# Altium PCB STMkaN.PcbDoc
Units mm, origin at the board's own origin, x right, y up, seen from the top; angles counter-clockwise.
Board outline 43 x 17.6 mm, 2 copper layers (Top Layer, Bottom Layer), stack 1.27 mm thick; 29 components, 38 nets, 228 pads, 2 vias.
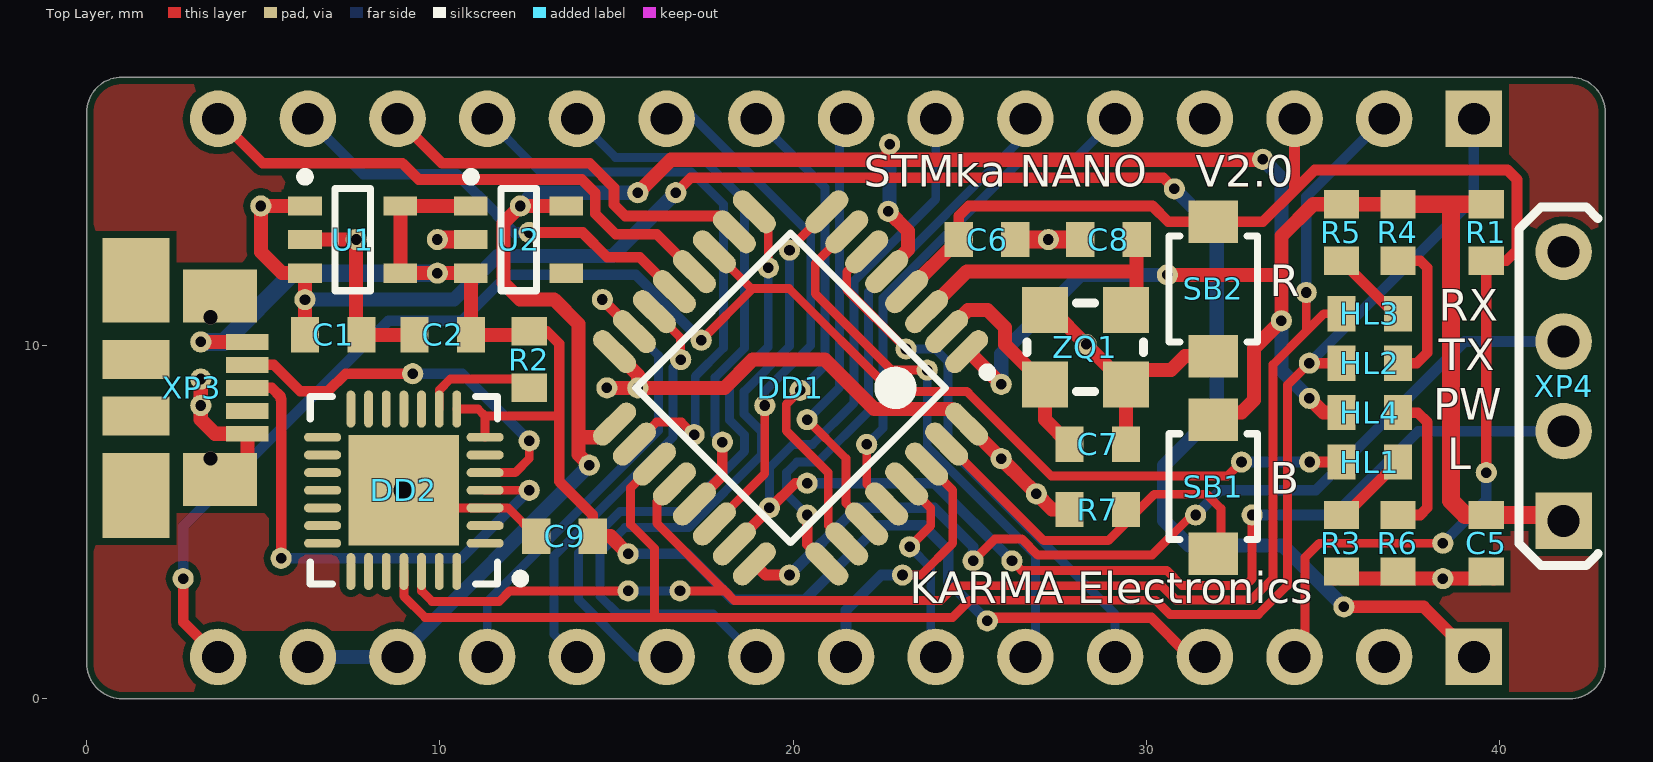
[diagram p0: Top Layer view]
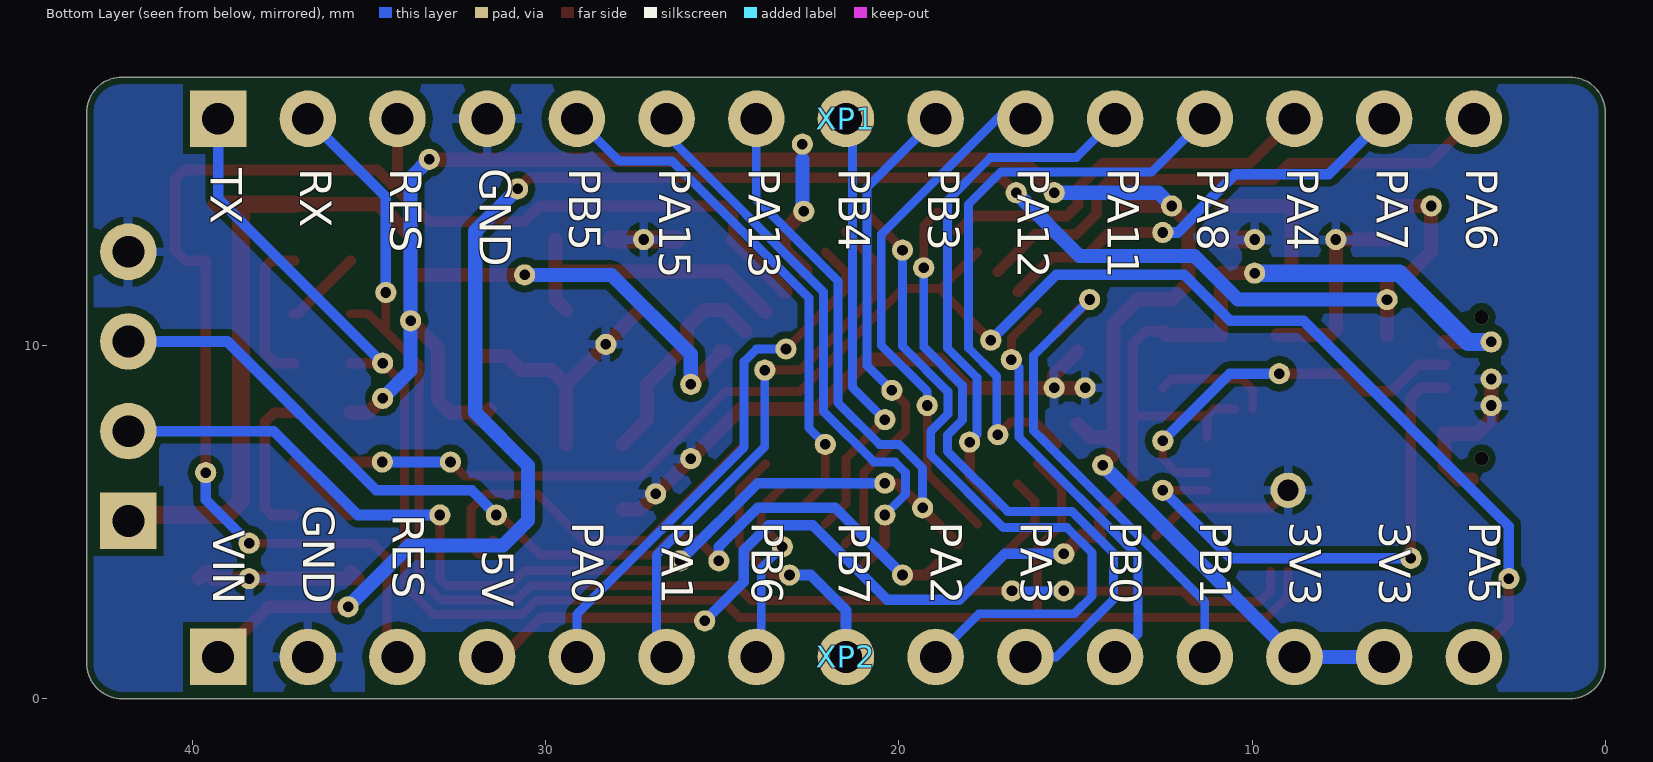
[diagram p1: Bottom Layer view, seen from below]

## Layer stack, top to bottom
Top Solder: solder mask 0.01, Solder Resist, Dk 3.5
Top Layer: signal copper 0.035
Dielectric 1: dielectric 1.2, FR-4, Dk 4.8
Bottom Layer: signal copper 0.035
Bottom Solder: solder mask 0.01, Solder Resist, Dk 3.5

## Board outline
0,1 0,16.6 cw(c1,16.6) 1,17.6 42,17.6 cw(c42,16.6) 43,16.6 43,1 cw(c42,1) 42,0 1,0 cw(c1,1)

## Design rules (kind name [scope] priority, off if disabled: settings)
Clearance [All] p1: gap=0.16 except(0.2: Arc-Poly Track-Poly SMDPad-Poly THPad-Poly Via-Poly Fill-Poly Poly-Poly)
PlaneClearance [All] p1: clearance=0.5
PlaneConnect [All] p1: planeconnectstyle=Relief reliefexpansion=0.508 reliefentries=4 reliefconductorwidth=0.25 reliefairgap=0.2
PolygonConnect [All] p1: connectstyle=Relief reliefconductorwidth=0.254 reliefentries=4 polygonreliefangle="90 Angle" airgapwidth=0.2
RoutingVias [All] p1: holewidth=0.3 width=0.6 viastyle="Through Hole" minholewidth=0.3 minwidth=0.6 maxholewidth=2 maxwidth=3
SolderMaskExpansion [All] p1: expansion=0.102
Width [All] p1: maxlimit=2 minlimit=0.2 preferedwidth=0.5
28 further rules are at their usual default settings.

## Components (designator, comment, footprint, x,y, rotation, side; value= is the part's Value field where it differs from the comment)
C1 "1u" 0603C 7.78,10.303 r180 top
C2 "1u" 0603C 9.28,10.3 r0 top
C5 "0.1u" 0603C 39.63,3.6 r90 top
C6 "1u" 0603C 24.696,13 r0 top
C7 "12p" 0603C 29.43,7.2 r180 top
C8 "12p" 0603C 28.13,13 r0 top
C9 "0.1u" 0603C 12.73,4.6 r0 top
DD1 "STM32F030K6T6" TQFP-32 19.93,8.8 r225 top
DD2 "CP2102" QFN-28 8.98,5.9 r180 top
HL1 "LED" 0603L 37.13,6.7 r180 top
HL2 "TX" 0603L 35.53,9.5 r0 top
HL3 "RX" 0603L 35.53,10.9 r0 top
HL4 "LED" 0603L 37.13,8.1 r180 top
R1 "10k" 0603R 39.63,14 r270 top
R2 "10k" 0603R 12.53,10.4 r270 top
R3 "1k" 0603R 35.53,3.6 r90 top
R4 "1k" 0603R 37.13,14 r270 top
R5 "1k" 0603R 35.53,14 r270 top
R6 "1k" 0603R 37.13,3.6 r90 top
R7 "10k" 0603R 29.43,5.354 r180 top
SB1 "B3U1000P" B3U1000P 31.9,6 r180 top
SB2 "B3U1000P" B3U1000P 31.9,11.6 r180 top
U1 "AP2204K-5.0TRG1" SOT23-5 7.53,13 r0 top
U2 "TC1185-3.3VCT713" SOT23-5 12.23,13 r0 top
XP1 "PLS-15" PLS-15 39.28,16.42 r180 bottom locked
XP2 "PLS-15" PLS-15 39.28,1.18 r180 bottom locked
XP3 "47346-0001" USB-micro 0,8.8 r0 top locked
XP4 "PLS-4" PLS-4 41.82,5.034 r90 top
ZQ1 "16MHz" SMD0302C4 27.23,9.1 r180 top

## Footprints (in the part's own frame and the unit in brackets; to place one, negate y for a bottom-side part, rotate by r counter-clockwise, add the part's x,y. Pads: shape width x height; smd on the part's side, far side on the other; paste and mask are expansions set on the pad)
0603C [mm]
  rect 0.8x1 smd: 1(0,0) 2(1.6,0)
  body extent -0.01,-0.38 1.64,0.42, height 0.81
0603L [mm]
  rect 0.8x1 smd: 1(0,0) 2(1.6,0)
  body extent -0.1,-0.5 1.7,0.5, height 0.5
0603R [mm]
  rect 0.8x1 smd: 1(0,0) 2(1.6,0)
  body extent -0.01,-0.38 1.64,0.42, height 0.31
B3U1000P [mm]
  rect 1.4x1.2 smd: 1(0,-1.9) 2(0,1.9)
  silkscreen extent -1.25,-1.5 1.25,1.5, body extent -1.25,-2 1.25,2, height 1.6
PLS-4 [mm]
  rect 1.6x1.6 hole 0.9: 1(0,0)
  round 1.6 hole 0.9: 2(2.54,0) 3(5.08,0) 4(7.62,0)
  silkscreen extent -1.27,-0.98 8.89,1.27, body extent -1.12,-1.12 8.74,1.12, height 8.5
PLS-15 [mm]
  rect 1.6x1.6 hole 0.9: 1(0,0)
  round 1.6 hole 0.9: 2(2.54,0) 3(5.08,0) 4(7.62,0) 5(10.16,0) 6(12.7,0) 7(15.24,0) 8(17.78,0) 9(20.32,0) 10(22.86,0) 11(25.4,0) 12(27.94,0) 13(30.48,0) 14(33.02,0) 15(35.56,0)
  body extent -1.12,-1.12 36.68,1.12, height 8.5
QFN-28 [mm] "QFN, 28-Leads, Body 5,00x5,00mm, Pitch 0,50mm, Thermal Pad 3,13x3,13mm, IPC Medium Density"
  oval 1.05x0.25 smd: 1(-2.3,1.5) 2(-2.3,1) 3(-2.3,0.5) 4(-2.3,0) 5(-2.3,-0.5) 6(-2.3,-1) 7(-2.3,-1.5) 15(2.3,-1.5) 16(2.3,-1) 17(2.3,-0.5) 18(2.3,0) 19(2.3,0.5) 20(2.3,1) 21(2.3,1.5)
  oval 0.25x1.05 smd: 8(-1.5,-2.3) 9(-1,-2.3) 10(-0.5,-2.3) 11(0,-2.3) 12(0.5,-2.3) 13(1,-2.3) 14(1.5,-2.3) 22(1.5,2.3) 23(1,2.3) 24(0.5,2.3) 25(0,2.3) 26(-0.5,2.3) 27(-1,2.3) 28(-1.5,2.3)
  rect 3.13x3.13 smd: 29(0,0)
  silkscreen extent -3.43,-2.65 2.65,2.65, body extent -2.5,-2.5 2.5,2.5, height 1
SMD0302C4 [mm] "SMD05032C4"
  rect 1.3x1.3 smd: 1(-2.2,-1.9) 2(0.1,-1.9) 3(0.1,0.2) 4(-2.2,0.2)
  silkscreen extent -2.7,-2.1 0.6,0.4, body extent -2.65,-2.1 0.55,0.4, height 0.8
SOT23-5 [mm] "SOT23, 5-Leads, Body 2,90x2,80mm, Pitch 0,95mm, IPC Medium Density"
  rect 0.95x0.55 smd: 1(-1.35,0.95) 2(-1.35,0) 3(-1.35,-0.95) 4(1.35,-0.95) 5(1.35,0.95)
  silkscreen extent -1.47,-1.45 0.5,1.9, body extent -0.87,-1.45 0.87,1.45, height 0.9
TQFP-32 [mm] "TQFP, 32-Leads, Body 7,00x7,00mm, Pitch 0,80mm, IPC Medium Density"
  oval 1.5x0.55 smd: 1(-4.25,2.8) 2(-4.25,2) 3(-4.25,1.2) 4(-4.25,0.4) 5(-4.25,-0.4) 6(-4.25,-1.2) 7(-4.25,-2) 8(-4.25,-2.8) 17(4.25,-2.8) 18(4.25,-2) 19(4.25,-1.2) 20(4.25,-0.4) 21(4.25,0.4) 22(4.25,1.2) 23(4.25,2) 24(4.25,2.8)
  oval 0.55x1.5 smd: 9(-2.8,-4.25) 10(-2,-4.25) 11(-1.2,-4.25) 12(-0.4,-4.25) 13(0.4,-4.25) 14(1.2,-4.25) 15(2,-4.25) 16(2.8,-4.25) 25(2.8,4.25) 26(2,4.25) 27(1.2,4.25) 28(0.4,4.25) 29(-0.4,4.25) 30(-1.2,4.25) 31(-2,4.25) 32(-2.8,4.25)
  silkscreen extent -4.37,-3.1 3.1,3.75, body extent -3.5,-3.5 3.5,3.5, height 1.2
USB-micro [mm]
  rect 1.9x2.4 smd: 0(1.4,-3.05) 0(1.4,3.05)
  rect 1.9x1.1 smd: 0(1.4,-0.8) 0(1.4,0.8)
  rect 2.1x1.5 smd: 0(3.775,-2.6) 0(3.775,2.6)
  rect 1.2x0.45 smd: 1(4.55,1.3) 2(4.55,0.65) 3(4.55,0) 4(4.55,-0.65) 5(4.55,-1.3)
  body extent -0.7,-3.99 4.73,3.99, height 2.68

## Part data
C1 C2 C5 C6 C7 C8 C9: library part SMD-CAP, "Capacitor"
DD1: "Controller"
HL1 HL4: library part LEDx1
HL2 HL3: library part LEDx1, "LED"
R1 R2 R3 R4 R5 R6 R7: library part SMD-RES, "Resistor"
SB1 SB2: library part SWITCH, "Button"
U1 U2: library part TPS76333DBVR, "POWER"
XP1 XP2: library part XP15, "Connector"
XP3: library part USB-micro, "Connector"
XP4: library part XP4, "Connector"
ZQ1: library part Quartz, "Quartz"

## Free pads (board coordinates)
  round 0.6 hole 0.3 mask+0: 1(2.73,3.4) 1(3.23,8.3) 1(3.23,9.05) 1(3.23,10.1) 1(4.93,13.95) 1(5.505,3.975) 1(6.18,11.3) 1(7.63,13) 1(9.23,9.2) 1(9.93,12.05) 1(9.93,13) 1(12.28,13.95) 1(12.53,5.9) 1(12.53,7.3) 1(12.53,13.2) 1(14.23,6.61) 1(14.601,11.301) 1(14.73,8.8) 1(15.33,3.05) 1(15.33,4.1) 1(15.605,8.8) 1(15.605,14.325) 1(16.68,14.325) 1(16.8,3.05) 1(16.82,9.6) 1(17.2,7.474) 1(17.4,10.149) 1(18,7.264) 1(19.2,8.3) 1(19.3,12.2) 1(19.33,5.4) 1(19.9,3.5) 1(19.9,12.7) 1(20.2,8.727) 1(20.4,5.2) 1(20.4,6.1) 1(20.4,7.9) 1(22.087,7.2) 1(22.696,13.8) 1(22.734,15.7) 1(23.1,3.5) 1(23.2,9.9) 1(23.3,4.3) 1(23.8,9.303) 1(25.1,3.9) 1(25.5,2.2) 1(25.895,6.795) 1(25.895,8.9) 1(26.2,3.9) 1(26.89,5.8) 1(27.23,13) 1(28.3,10.03) 1(30.6,12) 1(30.8,14.433) 1(31.4,5.2) 1(32.7,6.7) 1(33,5.2) 1(33.3,15.273) 1(33.83,10.7) 1(34.53,11.5) 1(34.622,8.5) 1(34.622,9.5) 1(34.63,6.7) 1(35.6,2.6) 1(38.4,3.4) 1(38.4,4.4) 1(39.63,6.4)
  round 1 hole 0.6: 2(8.98,5.9)

## Via types
v1: diameter 0.4, hole 0.4, Top Layer to Bottom Layer, tented both sides, 2 vias

## Nets (pads, with @x,y where several pads share a name; then routed paths per layer and width w, separated by ;. In a path a pad name is that pad's centre, name@x,y a point inside that pad or via, vN(x,y) a via of type N, cw(c..) or ccw(c..) an arc to the next point about the centre after c; other vN are vias at no path point)
3V3: C5.2 DD1.1 DD1.5 DD1.17 HL4.2 pad.1@12.28,13.95 pad.1@14.23,6.61 pad.1@15.605,14.325 pad.1@22.696,13.8 pad.1@22.734,15.7 pad.1@25.895,8.9 pad.1@30.6,12 pad.1@33.3,15.273 pad.1@33.83,10.7 pad.1@34.622,8.5 R1.1 R4.1 R5.1 SB1.1 U2.5 XP2.13 XP2.14 XP4.1 | length 91.6
  Top Layer w0.3: XP4.1@41.654,5.2 XP4.1
  Top Layer w0.4: U2.5 12.28,13.95 11.8,13.47 11.8,11.77 12.27,11.3 13.237,11.3 13.93,10.607 13.93,7.4 ; pad.1@14.23,6.61 13.93,6.91 13.93,7.4 ; DD1.17 14.57,7.4 13.93,7.4 ; pad.1@15.605,14.325 16.54,15.26 22.7,15.26 ; DD1.5 22.652,12.122 23.253,12.722 23.253,13.243 pad.1@22.696,13.8 ; pad.1@22.734,15.7 22.7,15.666 22.7,15.26 ; DD1.1 DD1.1@24.97,9.825 ; DD1.1@25.075,9.825 DD1.1@24.97,9.825 ; pad.1@25.895,8.9 DD1.1@24.97,9.825 ; pad.1@30.6,12 33.83,12 ; SB1.1@31.6,8.2 SB1.1 32.1,8.1 32.7,8.1 33.053,8.453 33.053,9.923 33.83,10.7 33.83,12 ; pad.1@33.3,15.26 22.7,15.26 ; pad.1@34.622,8.5 35.022,8.1 HL4.2 ; R4.1 34.73,14 33.83,13.1 33.83,12
  Top Layer w0.5: R4.1 38.63,14 ; R1.1@39.33,14 38.63,14 ; XP4.1@41.654,5.2 39.03,5.2 38.63,5.6 38.63,14
  Bottom Layer w0.4: XP2.14 XP2.13 pad.1@14.23,6.61 ; pad.1@12.28,13.95 12.655,14.325 pad.1@15.605,14.325 ; pad.1@22.73,13.76 22.73,15.26 ; pad.1@25.895,8.9 25.895,9.76 28.135,12 pad.1@30.6,12 ; pad.1@33.3,15.273 33.83,14.743 33.83,10.7 33.83,9.292 pad.1@34.622,8.5
5V: C2.2 C9.2 DD2.7 DD2.8 pad.1@3.23,10.1 pad.1@9.93,12.05 pad.1@15.33,4.1 pad.1@25.5,2.2 R2.1 U1.4 U1.5 U2.1 U2.3 XP2.4 XP3.1 | length 49.6
  Top Layer w0.25: DD2.8 11.08,8.2 11.28,8 ; DD2.7 11.28,8 ; 13.405,8 13.38,8 11.28,8
  Top Layer w0.3: R2.1 13.03,10.4 13.38,10.05 13.38,8 13.38,6.15 14.33,5.2 C9.2 ; pad.1@25.5,2.197 25.593,2.29 30.14,2.29 31.25,1.18 XP2.4
  Top Layer w0.4: pad.1@3.23,10.1 XP3.1 ; U1.4 U1.5 ; U1.4@8.93,12.05 9.93,12.05 U2.3 C2.2 12.43,10.3 R2.1 ; U1.5@8.98,13.95 U2.1 ; C9.2 14.83,4.6 pad.1@15.33,4.1
  Bottom Layer w0.3: pad.1@15.33,4.1 17,4.1 18.3,2.8 20.33,2.8 22.44,4.91 23.69,4.91 24.4,4.2 24.4,3.305 pad.1@25.5,2.205
  Bottom Layer w0.5: pad.1@3.23,10.1 3.888,10.1 5.838,12.05 pad.1@9.93,12.05
A0: DD1.15 pad.1@14.601,11.301 XP2.12 | length 14.1
  Top Layer w0.3: pad.1@14.601,11.301 DD1.15
  Bottom Layer w0.25: XP2.12 11.34,2.74 15.9,7.3 16.19,7.59 16.19,9.712 pad.1@14.601,11.301
A1: DD1.14 pad.1@16.82,9.6 XP2.11 | length 11.8
  Top Layer w0.25: DD1.14 16.815,10.218 16.815,9.907 16.82,9.902 pad.1@16.82,9.6
  Bottom Layer w0.25: XP2.11 13.23,1.83 13.23,4.03 16.6,7.4 16.6,9.38 pad.1@16.82,9.6
A2: DD1.9 pad.1@19.3,12.2 XP2.10 | length 18
  Top Layer w0.25: DD1.9 19.3,13.39 pad.1@19.3,12.2
  Bottom Layer w0.25: XP2.10 15.55,1.18 13.93,2.8 13.93,4.13 15.103,5.303 16.924,5.303 18.63,7.01 18.63,7.463 18.205,7.888 18.205,8.865 19.3,9.959 pad.1@19.3,12.2
A3: DD1.8 pad.1@19.9,12.7 XP2.9 | length 20.2
  Top Layer w0.25: pad.1@19.834,12.664 DD1.8
  Bottom Layer w0.25: XP2.9 17.735,2.405 15.032,2.405 14.53,2.906 14.53,4.13 15.243,4.843 17.043,4.843 19.1,6.9 19.1,7.573 18.615,8.058 18.615,8.695 19.9,9.98 pad.1@19.9,12.7
A4_SDA: DD1.30 pad.1@23.1,3.5 XP2.8 | length 8.4
  Top Layer w0.25: XP2.8 XP2.8@21.5,1.43 ; pad.1@23.1,3.5 23.625,3.5 24.525,4.4 24.525,5.902 DD1.30
  Bottom Layer w0.3: XP2.8@21.361,1.638 XP2.8 21.5,2.5 22.5,3.5 pad.1@23.1,3.5
A5_SCL: DD1.29 pad.1@23.3,4.3 XP2.7 | length 5.7
  Top Layer w0.25: DD1.29 23.9,5.396 23.9,4.9 pad.1@23.3,4.3
  Bottom Layer w0.25: pad.1@23.3,4.3 23.9,3.7 23.9,1.32 XP2.7
A6: DD1.7 pad.1@23.8,9.303 XP2.6 | length 15.7
  Top Layer w0.25: DD1.7 20.63,12.328 20.63,11.47 22.797,9.303 pad.1@23.8,9.303
  Bottom Layer w0.25: pad.1@23.8,9.303 23.8,7.127 26.87,4.058 26.87,1.47 XP2.6
A7: DD1.6 pad.1@23.2,9.9 XP2.5 | length 15.3
  Top Layer w0.25: DD1.6 21.521,12.088 21.521,11.579 pad.1@23.2,9.9
  Bottom Layer w0.25: pad.1@23.2,9.9 24.03,9.9 24.385,9.545 24.385,7.122 29.12,2.387 XP2.5
BOOT0: DD1.31 R7.1 SB1.2 | length 11.1
  Top Layer w0.25: DD1.31@24.512,7.062 27.1,4.475 28.921,4.475 30.231,5.785 31.715,5.785 32.115,5.385 32.115,4.315 SB1.2 ; SB1.2@31.5,4.5 SB1.2@31.74,4.26
CLK: DD1.24 pad.1@19.9,3.5 pad.1@25.1,3.9 pad.1@31.4,5.2 XP4.3 | length 27.6
  Top Layer w0.25: pad.1@25.1,3.9 25.723,4.523 26.472,4.523 26.93,4.065 30.162,4.065 31.297,5.2 pad.1@31.4,5.2
  Top Layer w0.3: DD1.24 19.22,3.5 pad.1@19.9,3.5
  Bottom Layer w0.3: pad.1@19.9,3.5 21.8,5.4 24,5.4 25.1,4.3 pad.1@25.1,3.9 ; pad.1@31.4,5.2 32.1,5.9 34.8,5.9 39.014,10.114 XP4.3
D2: DD1.28 pad.1@22.087,7.2 XP1.5 | length 14.9
  Top Layer w0.25: pad.1@22.087,7.2 22.087,6.078 DD1.28
  Bottom Layer w0.25: pad.1@22.087,7.2 22.55,7.663 22.55,11.35 26.419,15.219 27.92,15.219 XP1.5
D3: DD1.25 pad.1@20.4,5.2 XP1.6 | length 16.2
  Top Layer w0.3: pad.1@20.4,5.2 20.4,4.37 DD1.25
  Bottom Layer w0.25: pad.1@20.4,5.2 19.815,5.785 19.815,6.399 20.115,6.7 20.703,6.7 22.14,8.136 22.14,11.52 26.58,15.96 XP1.6
D4_DIO: DD1.23 pad.1@19.33,5.4 pad.1@20.4,6.1 pad.1@26.2,3.9 pad.1@33,5.2 XP1.7 XP4.2 | length 41.6
  Top Layer w0.25: pad.1@26.2,3.9 26.47,3.63 30.58,3.63 31.005,3.205 32.805,3.205 33,3.4 pad.1@33,5.2
  Top Layer w0.3: DD1.23 19.344,5.386 20.059,6.1 pad.1@20.4,6.1
  Bottom Layer w0.25: pad.1@19.33,5.4 19.33,6.53 20,7.2 20.55,7.2 21.73,8.379 21.73,11.83 24.04,14.14 XP1.7
  Bottom Layer w0.3: pad.1@20.4,6.1 24,6.1 pad.1@26.2,3.9 ; pad.1@32.93,5.2 33,5.2 35.33,5.2 37.704,7.574 XP4.2
D5: DD1.27 pad.1@20.4,7.9 XP1.8 | length 13
  Top Layer w0.25: pad.1@20.4,7.9 21.5,6.8 21.5,5.533 DD1.27@22.087,4.946
  Bottom Layer w0.25: pad.1@20.4,7.9 21.32,8.82 21.32,16.16 XP1.8@21.5,16.34 ; XP1.8@21.32,16.16 XP1.8@21.5,16.34 ; XP1.8 XP1.8@21.5,16.34 ; XP1.8@21.58,16.42 21.54,16.38 XP1.8@21.5,16.34
D6: DD1.26 pad.1@20.2,8.727 XP1.9 | length 14
  Top Layer w0.25: pad.1@20.2,8.727 19.81,8.337 19.81,7.59 21,6.4 21,4.902 DD1.26
  Bottom Layer w0.25: XP1.9 20.91,14.47 20.91,9.437 pad.1@20.2,8.727
D7: DD1.22 pad.1@19.2,8.3 XP1.10 | length 14.4
  Top Layer w0.25: DD1.22@17.774,4.946 19.2,6.373 pad.1@19.2,8.3
  Bottom Layer w0.25: XP1.10@16.82,16.52 17.122,16.52 20.5,13.142 20.5,10 19.2,8.7 pad.1@19.2,8.3
D8: DD1.21 pad.1@18,7.264 XP1.11 | length 15.6
  Top Layer w0.3: DD1.21 DD1.21@17.6,5.904 ; DD1.21 18,6.304 pad.1@18,7.264
  Bottom Layer w0.25: XP1.11 14.977,15.323 17.407,15.323 18.63,14.1 18.63,9.93 17.79,9.09 17.79,7.474 pad.1@18,7.264
D9: DD1.18 pad.1@17.2,7.474 XP1.12 | length 16.7
  Top Layer w0.25: DD1.18@15.511,7.238 DD1.18 16.136,7.834 16.84,7.834 pad.1@17.2,7.474
  Bottom Layer w0.25: XP1.12 12.847,14.913 17.117,14.913 18.03,14 18.03,9.93 17.23,9.13 pad.1@17.23,7.5
GND: C1.1 C2.1 C5.1 C6.2 C7.1 C8.1 C9.1 DD1.16 DD1.32 DD2.3 DD2.29 pad.1@3.23,8.3 pad.1@3.23,9.05 pad.1@7.63,13 pad.1@9.93,13 pad.1@14.73,8.8 pad.1@15.605,8.8 pad.1@25.895,6.795 pad.1@26.89,5.8 pad.1@27.23,13 pad.1@28.3,10.03 pad.1@38.4,3.4 pad.2 R3.1 R6.1 R7.2 SB2.2 U1.2 U2.2 XP1.4 XP2.2 XP3.0@3.775,6.2 XP3.5 XP4.4 ZQ1.2 ZQ1.4 | length 46.4
  Top Layer w0.25: DD2.29 9.48,5.4 11.93,5.4 C9.1
  Top Layer w0.4: pad.1@3.23,9.05 3.23,8.3 3.23,7.9 3.63,7.5 XP3.5 4.55,6.598 4.152,6.2 XP3.0@3.775,6.2 ; U1.2 7.63,13 7.63,10.453 C1.1 7.78,10.3 C2.1 ; pad.1@14.73,8.8 pad.1@15.605,8.8 ; DD1.16 15.605,9.165 pad.1@15.605,8.8 ; DD1.32 25.79,6.9 25.895,6.795 26.195,6.495 26.295,6.395 26.395,6.295 26.89,5.8 27.336,5.353 R7.2 ; DD1.32 24.49,8.2 22.3,8.2 20.9,9.6 18.86,9.6 18.06,8.8 pad.1@15.605,8.8 ; ZQ1.2 27.33,11 28.3,10.03 ZQ1.4 ; C7.1 ZQ1.4 ; SB2.2 31.1,9.7 30.703,9.303 29.833,9.303 ZQ1.4 ; R3.1@35.33,3.4 R3.1 ; R3.1@35.53,3.4 R6.1@37.13,3.4 ; XP2.2 XP2.2@36.93,1.37 ; R6.1@37.13,3.4 38.4,3.4 39.43,3.4 C5.1 C5.1@39.83,3.4
  Top Layer w0.5: pad.1@9.93,13 U2.2 ; C6.2 27.23,13 C8.1
NetC7_2: C7.2 DD1.2 ZQ1.3 | length 6.2
  Top Layer w0.4: DD1.2 24.958,11 25.507,11 26,10.507 26,10.03 ZQ1.3 27.13,7.9 C7.2
NetC8_2: C8.2 DD1.3 ZQ1.1 | length 8.5
  Top Layer w0.4: DD1.3 24.927,12.1 29.725,12.1 ; ZQ1.1 29.73,11.3 C8.2
NetDD2_4: DD2.4 pad.1@5.505,3.975 pad.1@12.53,5.9 XP3.3 | length 14.7
  Top Layer w0.25: DD2.4 pad.1@12.53,5.9
  Top Layer w0.3: XP3.3 5.24,8.8 5.5,8.54 5.5,8.48 5.505,8.475 pad.1@5.505,3.975
  Bottom Layer w0.3: pad.1@5.505,3.975 10.605,3.975 pad.1@12.53,5.9
NetDD2_5: DD2.5 pad.1@9.23,9.2 pad.1@12.53,7.3 XP3.2 | length 11.2
  Top Layer w0.25: DD2.5 12.13,6.4 12.53,6.8 pad.1@12.53,7.3
  Top Layer w0.3: XP3.2 5.297,9.45 6.047,8.7 6.83,8.7 7.33,9.2 pad.1@9.23,9.2
  Bottom Layer w0.3: pad.1@9.23,9.2 10.63,9.2 pad.1@12.53,7.3
NetDD2_9: DD2.9 R2.2 | length 3.3
  Top Layer w0.25: DD2.9 9.98,8.736 10.294,9.05 12.28,9.05 R2.2
NetHL1_1: HL1.1 R3.2 | length 2.2
  Top Layer w0.3: R3.2 35.63,5.2 HL1.1
NetHL2_2: HL2.2 R4.2 | length 4.3
  Top Layer w0.3: HL2.2 37.664,9.5 37.96,9.796 37.96,12.2 37.76,12.4 R4.2
NetHL3_2: HL3.2 R5.2 | length 2.2
  Top Layer w0.3: R5.2 37.03,10.9 HL3.2
NetHL4_1: HL4.1 R6.2 | length 4.3
  Top Layer w0.3: R6.2 37.76,5.2 37.96,5.4 37.96,7.834 37.694,8.1 HL4.1
RESET: C6.1 DD1.4 pad.1@38.4,4.4 pad.1@39.63,6.4 R1.2 SB2.1 XP1.3 XP2.3 | length 40.2
  Top Layer w0.25: XP2.3 34.5,1.48 34.5,4 34.9,4.4 pad.1@38.4,4.4
  Top Layer w0.3: C6.1 24.696,13.666 24.98,13.95 30.18,13.95 30.63,13.5 SB2.1 33.3,13.5 34.2,14.4 ; XP1.3 34.2,14.4 ; pad.1@39.63,6.4 R1.2 40.2,12.4 40.5,12.7 40.5,14.7 40.23,14.97 34.77,14.97 34.2,14.4
  Top Layer w0.4: DD1.4@23.253,11.522 DD1.4 C6.1
  Bottom Layer w0.3: pad.1@38.4,4.4 39.63,5.63 pad.1@39.63,6.4
SPI_CS: DD1.10 XP1.13 | length 11.1
  Top Layer w0.3: XP1.13 10.06,15.16 14.24,15.16 14.93,14.47 14.93,13.985 15.25,13.666 17.893,13.666 DD1.10
SPI_MISO: DD1.12 XP1.15 | length 15.6
  Top Layer w0.3: XP1.15 4.98,15.16 8.94,15.16 9.4,14.7 14.019,14.7 14.4,14.319 14.4,13.73 14.98,13.15 16.146,13.15 DD1.12
SPI_MOSI: DD1.13 pad.1@12.53,13.2 XP1.14 | length 12.5
  Top Layer w0.3: pad.1@12.53,13.2 14.04,13.2 14.74,12.5 15.664,12.5 DD1.13 DD1.13@16.608,11.522
  Bottom Layer w0.3: XP1.14 7.832,14.847 10.482,14.847 11.63,13.7 11.63,13.681 12.111,13.2 pad.1@12.53,13.2
SPI_SCK: DD1.11 HL1.2 pad.1@2.73,3.4 pad.1@17.4,10.149 pad.1@32.7,6.7 pad.1@34.63,6.7 XP2.15 | length 45.1
  Top Layer w0.25: pad.1@17.4,10.149 18.865,11.615 19.885,11.615 22.8,8.7 24.919,8.7 25.077,8.542 27.319,6.3 32.3,6.3 pad.1@32.7,6.7 ; DD1.11 18.827,11.6
  Top Layer w0.3: pad.1@2.73,3.4 2.73,2.17 XP2.15 ; pad.1@34.63,6.7 HL1.2
  Bottom Layer w0.3: pad.1@2.73,3.4 2.73,4.885 8.545,10.7 10.621,10.7 11.921,12 15.549,12 pad.1@17.4,10.149 ; pad.1@32.7,6.7 pad.1@34.63,6.7
UART_RX: DD1.20 DD2.26 HL3.1 pad.1@15.33,3.05 pad.1@16.8,3.05 pad.1@34.53,11.5 XP1.2 | length 45.1
  Top Layer w0.25: DD2.26 9.48,3.05 9.78,2.75 11.68,2.75 11.98,3.05 pad.1@15.33,3.05 ; DD1.20 16.146,5.581 16.146,4.969 18.015,3.1 ; pad.1@16.8,3.05 18.065,3.05 18.335,2.78 24.18,2.78 24.595,3.195 30.435,3.195 30.835,2.795 32.975,2.795 33.59,3.41 33.59,9.46 34.53,10.4 ; pad.1@34.53,11.5 34.53,10.4 ; HL3.1 35.03,10.9 34.53,10.4
  Bottom Layer w0.25: pad.1@15.33,3.05 pad.1@16.8,3.05
  Bottom Layer w0.3: pad.1@34.53,11.5 34.53,14.21 XP1.2
UART_TX: DD1.19 DD2.25 HL2.1 pad.1@34.622,9.5 XP1.1 | length 47.9
  Top Layer w0.25: DD2.25 8.98,2.9 9.58,2.3 16.076,2.3 ; DD1.19 15.4,5.967 15.4,4.93 16.076,4.254 16.076,2.3 ; pad.1@34.622,9.5 34,8.878 34,3.205 33.18,2.385 30.666,2.385 30.266,2.785 25.005,2.785 24.52,2.3 16.076,2.3
  Top Layer w0.3: pad.1@34.622,9.5 HL2.1
  Bottom Layer w0.3: pad.1@34.622,9.5 39.28,14.158 XP1.1
VIN: C1.2 pad.1@4.93,13.95 pad.1@6.18,11.3 pad.1@16.68,14.325 pad.1@30.8,14.433 pad.1@35.6,2.6 U1.1 U1.3 XP2.1 | length 52.9
  Top Layer w0.3: pad.1@16.68,14.325 17.105,14.75 30.483,14.75 pad.1@30.8,14.433
  Top Layer w0.35: pad.1@35.6,2.6 37.86,2.6 XP2.1
  Top Layer w0.4: C1.2 6.18,11.3 U1.3 5.53,12.05 4.93,12.65 4.93,13.95 U1.1
  Bottom Layer w0.4: pad.1@6.18,11.3 10.4,11.3 11.629,12.529 14.884,12.529 pad.1@16.68,14.325 ; pad.1@30.8,14.433 32,13.233 32,8.1 30.5,6.6 30.5,5.043 31.211,4.332 33.868,4.332 pad.1@35.6,2.6
pads on no net: DD2.1 DD2.2 DD2.6 DD2.10 DD2.11 DD2.12 DD2.13 DD2.14 DD2.15 DD2.16 DD2.17 DD2.18 DD2.19 DD2.20 DD2.21 DD2.22 DD2.23 DD2.24 DD2.27 DD2.28 U2.4 XP3.0@1.4,5.75 XP3.0@1.4,8 XP3.0@1.4,9.6 XP3.0@1.4,11.85 XP3.0@3.775,11.4 XP3.4
copper on no net:
  other v1: 3.5,6.8 3.5,10.8

## Polygon pours and split planes (outlines as drawn)
GND on Bottom Layer "Bottom Layer-No Net" (solid, remove dead copper, pour order 18): 0.2,1 0.2,16.6 cw(c1,16.6) 1,17.4 42,17.4 cw(c42,16.6) 42.8,16.6 42.8,1 cw(c42,1) 42,0.2 1,0.2 cw(c1,1)
no net on Top Layer "Top Layer-No Net" (solid, pour order 16): 0.2,1 0.2,16.6 cw(c1,16.6) 1,17.4 42,17.4 cw(c42,16.6) 42.8,16.6 42.8,1 cw(c42,1) 42,0.2 1,0.2 cw(c1,1)

## Other copper
Top Layer:
  pour cut-out: 39.5,12.6 43,12.6 43,5.1 42.9,5 39.5,5
  pour cut-out: 3.4,0 3.3,0 3.3,1.918 9.3,1.918 9.3,0
  pour cut-out: 5.63,14.653 14.227,14.653 14.227,17.39 17.105,17.39 17.105,14.705 26.557,14.705 26.996,14.265 27.331,14.6 38.93,14.6 38.93,13.859 39.83,12.959 39.83,3.815 39.022,3.815 37.607,2.4 33.13,2.4 32.23,3.3 32.012,3.081 13.456,3.081 13.237,3.3 12.687,2.75 9.33,2.75 5.785,6.295 5.481,6.295
Bottom Layer:
  pour cut-out: 4.24,17.95 4.24,16.068 4.222,16.05 6.959,16.05 6.959,17.95
  pour cut-out: 43,5.9 41.035,5.9 41,5.865 40.947,5.919 40.947,10.618 41.089,10.618 41.559,11.088 43,11.088
  pour cut-out: 28.785,0 28.8,0.015 28.8,1.9 34.793,1.9 35.129,1.564 35.129,0
  pour cut-out: 3.3,0 3.3,1.893 8.5,1.893 8.5,0.039 8.539,0
  pour cut-out: 18,2 26,2 26,4 24,6 23,5 18,5
  pour cut-out: 24,13 27,16 18,16 18,13

## Silkscreen, mask and mechanical layers (free items; w line width, h text height)
Top Overlay:
  text "STMka NANO" at 22,14.2 h1.52
  text "V2.0" at 31.4,14.2 h1.52
  text "R" at 33.5,11.1 h1.52
  text "RX" at 38.28,10.4 h1.52
  text "TX" at 38.28,9 h1.52
  text "PW" at 38.13,7.6 h1.52
  text "L" at 38.53,6.2 h1.52
  text "B" at 33.5,5.5 h1.52
  text "KARMA Electronics" at 23.3,2.4 h1.52
Bottom Overlay:
  text "PA6" at 4.228,15.023 h1.52 r90
  text "PA7" at 6.768,15.023 h1.52 r90
  text "PA4" at 9.308,15.023 h1.52 r90
  text "PA8" at 11.848,15.023 h1.52 r90
  text "PA11" at 14.388,15.023 h1.52 r90
  text "PA12" at 16.928,15.023 h1.52 r90
  text "PB3" at 19.468,15.023 h1.52 r90
  text "PB4" at 22.008,15.023 h1.52 r90
  text "PA13" at 24.548,15.023 h1.52 r90
  text "PA15" at 27.088,15.023 h1.52 r90
  text "PB5" at 29.628,15.023 h1.52 r90
  text "GND" at 32.168,15.023 h1.52 r90
  text "RES" at 34.708,15.023 h1.52 r90
  text "RX" at 37.248,15.023 h1.52 r90
  text "TX" at 39.788,15.023 h1.52 r90
  text "GND" at 37.172,5.473 h1.52 r90
  text "RES" at 34.632,5.219 h1.52 r90
  text "PA5" at 4.152,5.015 h1.52 r90
  text "3V3" at 6.692,5.015 h1.52 r90
  text "3V3" at 9.232,5.015 h1.52 r90
  text "PB1" at 11.772,5.015 h1.52 r90
  text "PB0" at 14.312,5.015 h1.52 r90
  text "PA3" at 16.852,5.015 h1.52 r90
  text "PA2" at 19.392,5.015 h1.52 r90
  text "PB6" at 24.472,5.015 h1.52 r90
  text "PA1" at 27.012,5.015 h1.52 r90
  text "PA0" at 29.552,5.015 h1.52 r90
  text "PB7" at 22,5 h1.52 r90
  text "VIN" at 39.712,4.761 h1.52 r90
  text "5V" at 32.092,4.203 h1.52 r90
Mechanical 2:
  the board outline again, w0.2
Mechanical 4:
  lines w0.05: 0,8.8 43,8.8
Mechanical 7:
  lines w0.2: 0.2,1 ccw(c1,1) 1,0.2 42,0.2 ccw(c42,1) 42.8,1 42.8,16.6 ccw(c42,16.6) 42,17.4 1,17.4 ccw(c1,16.6) 0.2,16.6 0.2,1